# EAGLE board 2020-08-29-TinyISD1700_V2-AMD-sop-SPI-1206_SPI (EAGLE 7.5.0)
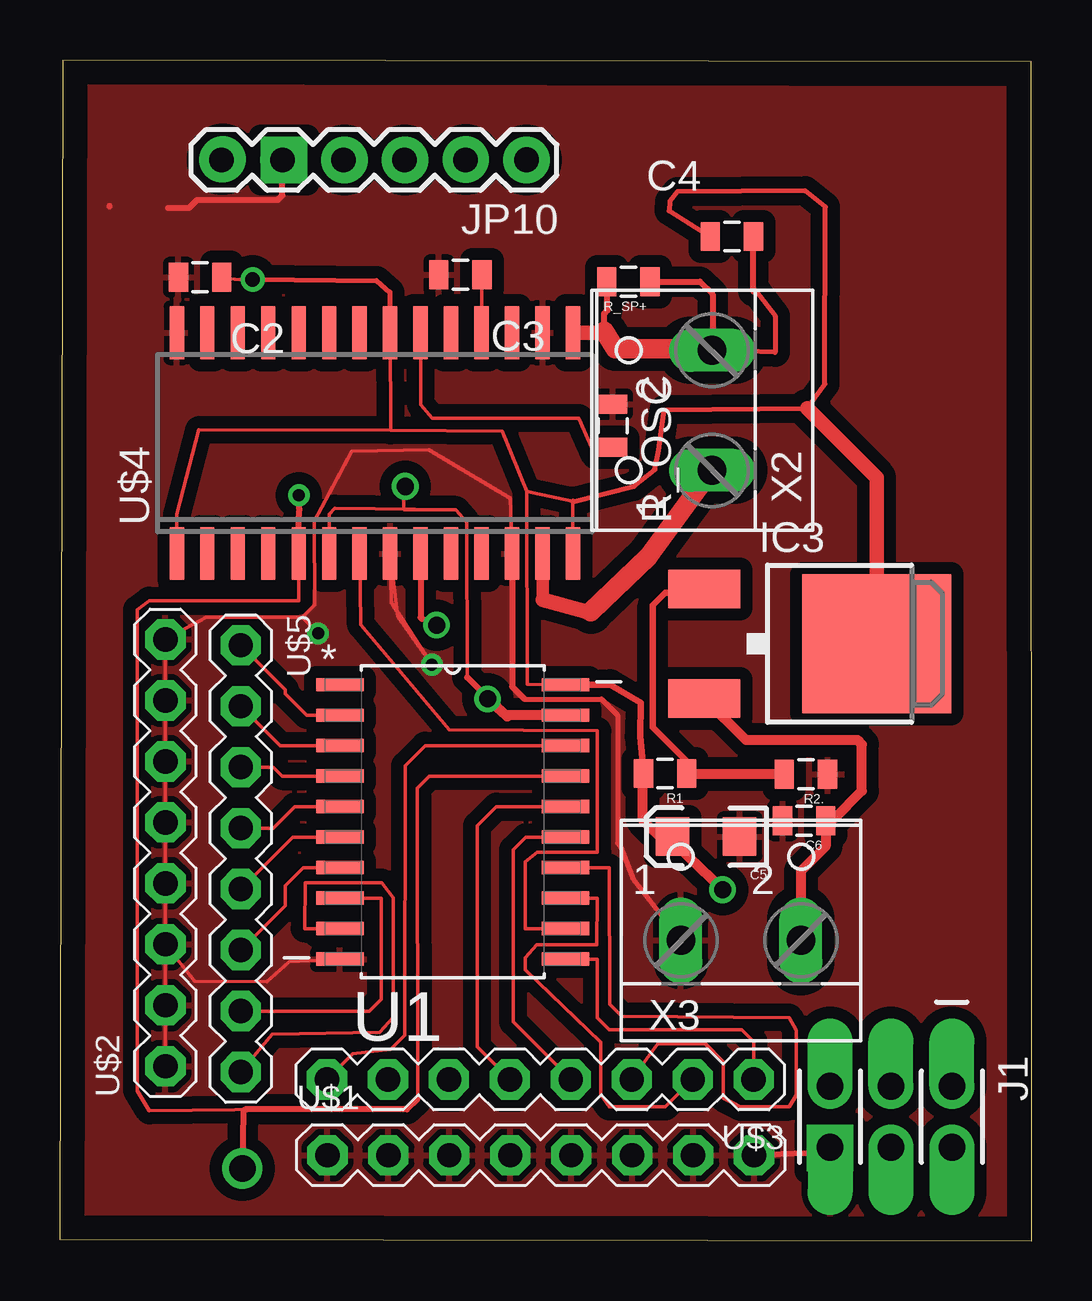
[diagram p0: board, top side]
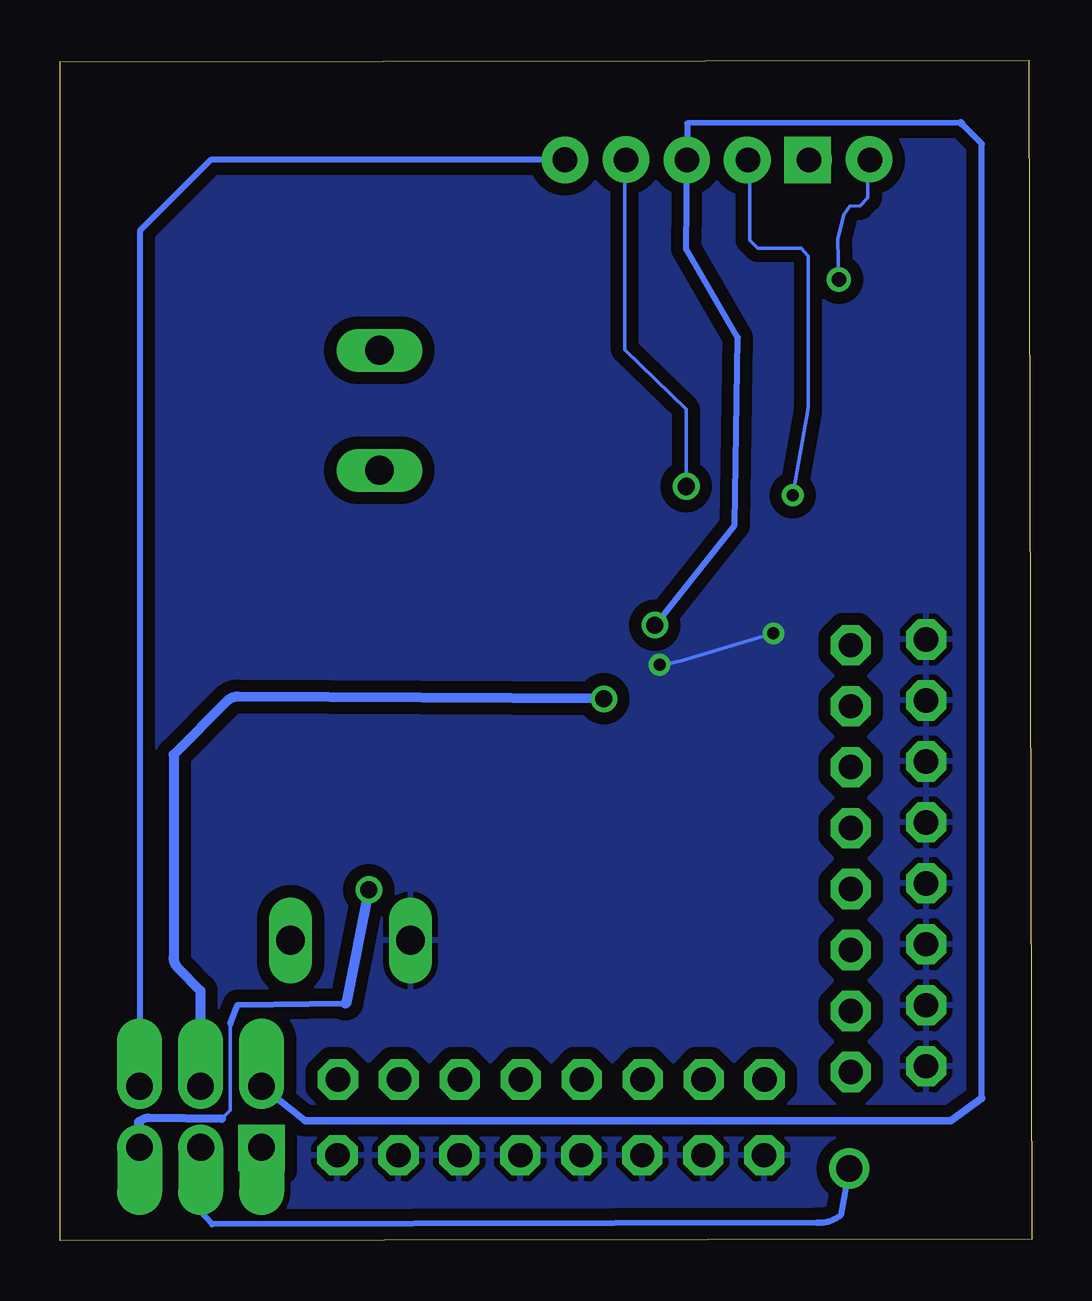
[diagram p1: board, bottom side, seen from below]

Size 40.48 x 49.19 mm. Coordinates in mm from the lower left corner, seen from the top.
Outline: 0,0.06 40.48,0 40.47,49.11 0.11,49.19 0,0.06
Copper layers (1*16): Top 0.035mm / dielectric 1.5mm / Bottom 0.035mm
Design rules "default *": minimum track width 10mil, minimum drill 24mil, track to track 20mil, track to pad 20mil, pad to pad 20mil, via to via 20mil, smd to smd 8mil, copper to edge 40mil, drill to drill 8mil, minimum pad ring 10mil, minimum via ring 8mil, stop-mask expansion 4mil, vias tented up to drill 0mil, thermal gap 10mil

## Footprints (pad centres in the part's own frame; a part is rotated, then mirrored left to right if it is on the bottom)
0805 = smd 0.8 x 1.2: 1 -0.9,0; 2 0.9,0
EIA3216 = smd 1.4 x 1.6: A 1.4,0; C -1.4,0
DPACK = smd 1.6 x 3: 1 -2.28,-4.8; 3 2.28,-4.8 | smd 5.8 x 6.2: 4 0,2.38
2X3_OFFSET = drill 1.118 pad 1.88 offset: 1 -2.54,-1.27; 2 -2.54,1.27; 3 0,-1.27; 4 0,1.27; 5 2.54,-1.27; 6 2.54,1.27
1X06 = drill 1.016 pad 1.88: 1 0,0; 2 2.54,0; 3 5.08,0; 4 7.62,0; 5 10.16,0; 6 12.7,0
SOIC127P1032X265-20N = smd 1.981 x 0.559: 1 -4.699,5.715; 2 -4.699,4.445; 3 -4.699,3.175; 4 -4.699,1.905; 5 -4.699,0.635; 6 -4.699,-0.635; 7 -4.699,-1.905; 8 -4.699,-3.175; 9 -4.699,-4.445; 10 -4.699,-5.715; 11 4.699,-5.715; 12 4.699,-4.445; 13 4.699,-3.175; 14 4.699,-1.905; 15 4.699,-0.635; 16 4.699,0.635; 17 4.699,1.905; 18 4.699,3.175; 19 4.699,4.445; 20 4.699,5.715
8PIN_HEADER = drill 1.016 pad 1.676 octagon: P$1 0,0; P$2 2.54,0; P$3 5.08,0; P$4 7.62,0; P$5 10.16,0; P$6 12.7,0; P$7 15.24,0; P$8 17.78,0
SO28W = smd 0.6 x 2.2: 1 -8.255,-4.6; 2 -6.985,-4.6; 3 -5.715,-4.6; 4 -4.445,-4.6; 5 -3.175,-4.6; 6 -1.905,-4.6; 7 -0.635,-4.6; 8 0.635,-4.6; 9 1.905,-4.6; 10 3.175,-4.6; 11 4.445,-4.6; 12 5.715,-4.6; 13 6.985,-4.6; 14 8.255,-4.6; 15 8.255,4.6; 16 6.985,4.6; 17 5.715,4.6; 18 4.445,4.6; 19 3.175,4.6; 20 1.905,4.6; 21 0.635,4.6; 22 -0.635,4.6; 23 -1.905,4.6; 24 -3.175,4.6; 25 -4.445,4.6; 26 -5.715,4.6; 27 -6.985,4.6; 28 -8.255,4.6
W237-102 = drill 1.194 long: 1 -2.5,-1.27; 2 2.5,-1.27

## Placement (x,y rotation side)
C2  [0805]  5.84,40.14 180 top
C3  [0805]  16.69,40.24 180 top
C4  [0805]  27.99,41.83 0 top
C5  [EIA3216]  26.92,16.83 180 top
C6  [0805]  31,17.49 180 top
IC3  LM317MDT  [DPACK]  31.65,24.86 270 top
J1  AVR_SPI_PRG_6OFFSET_PADS  [2X3_OFFSET]  34.62,5.16 180 top
JP10  [1X06]  19.43,45.03 180 top
R1  [0805]  25.21,19.45 180 top
R2.  [0805]  31.08,19.43 180 top
R_OSC  80kohm  [0805]  23.03,33.95 270 top
R_SP+  80kohm  [0805]  23.68,39.95 180 top
U1  ATTINY4313-SU  [SOIC127P1032X265-20N]  16.36,17.44 0 top
U$1  8PIN_HEADER  [8PIN_HEADER]  11.14,3.55 0 top
U$2  8PIN_HEADER  [8PIN_HEADER]  4.39,7.26 90 top
U$3  8PIN_HEADER  [8PIN_HEADER]  28.9,6.71 180 top
U$4  ISD1700SY  [SO28W]  13.12,33.22 0 top
U$5  8PIN_HEADER  [8PIN_HEADER]  7.53,24.8 270 top
X2  [W237-102]  25.9,34.59 90 top
X3  [W237-102]  28.37,13.78 0 top

## Library data of the parts
C2-C6 R_OSC R_SP+ = SparkFun2; OC_FARNELL: unknown
IC3 = v-reg; OC_FARNELL: unknown
J1 R1 R2. = SparkFun; OC_FARNELL: unknown
JP10 = SparkFun-Connectors; OC_FARNELL: unknown
U1 = Atmel_By_element14_Batch_1-00; MF: MICROCHIP; MPN: ATTINY4313-SU; OC_FARNELL: 1841621; OC_NEWARK: 12T1340; PACKAGE: SOIC-20; SUPPLIER: Atmel
U$1-U$3 U$5 = arduino; MF: RENESAS; MPN: YSDKS128E10; OC_FARNELL: 2946736
U$4 = isd-new-1; OC_FARNELL: unknown
X2 X3 = con-wago-500; OC_FARNELL: unknown; OC_NEWARK: 70K9898

## Nets
ANALN: J1.5 JP10.3 U$4.9
CSK: J1.3 JP10.2 U1.19 U$4.6
GND: C2.2 C3.2 C5.C C6.2 J1.6 JP10.5 R2..1 R_OSC.1 U1.10 U$1.P$1 U$1.P$2 U$1.P$3 U$1.P$4 U$1.P$5 U$1.P$6 U$1.P$7 U$1.P$8 U$2.P$1 U$2.P$2 U$2.P$3 U$2.P$4 U$2.P$5 U$2.P$6 U$2.P$7 U$2.P$8 U$4.8 U$4.12 U$4.16 U$4.28 X3.1
MISO: J1.1 JP10.1
MOSI: J1.4 JP10.4 U1.17 U$4.5
N$1: R_OSC.2 U$4.20
N$2: U1.13 U$3.P$2
N$3: U1.14 U$3.P$3
N$4: C4.2 R_SP+.1 X2.2
N$5: C3.1 U$4.18
N$6: U$4.13 X2.1
N$7: R_SP+.2 U$4.15
N$8: U1.15 U$3.P$4
N$9: U1.11 U$3.P$1
N$11: U1.9 U$5.P$8
N$12: U1.8 U$5.P$7
N$13: U1.7 U$5.P$6
N$14: U1.6 U$5.P$5
N$15: U1.3 U$5.P$2
N$16: U1.2 U$5.P$1
N$20: U1.16 U$3.P$5
N$28: C6.1 IC3.3 X3.2
N$29: IC3.1 R1.1 R2..2
PA0: U1.5 U$5.P$4
PA1: U1.4 U$5.P$3
Q: U1.18 U$3.P$8
SS: U1.12 U$4.7
VCC: C2.1 C4.1 C5.A IC3.4 J1.2 JP10.6 R1.2 U1.20 U$4.1 U$4.14 U$4.21

## Tracks (layer width: path | path; a pad name or v marks a point on that pad's centre or on a via)
ANALN  (via drill 0.5)
  Top 0.152: U$4.9 15.03,25.89 15.7,25.63
  Top 0.254: U$4.9 15.03,25.96 15.09,25.9 v15.66,25.65
  Bottom 0.254: 2.08,5.92 2.07,45.7 2.94,46.56 14.35,46.55 JP10.3 14.39,41.32 12.24,37.62 12.37,29.8 v15.66,25.65
  Bottom 0.305: J1.5 30.25,4.99 3.37,4.99 2.08,5.92 | 2.9,46.52 2.94,46.56
CSK  (via drill 0.7 pad 0.81)
  Top 0.152: U$4.6 11.22,30.26 11.44,30.51 16.49,30.45 | 16.49,30.45 16.94,29.92 16.97,23.47 | 16.49,30.45 14.34,30.45 14.31,30.48 14.31,31.33 v14.4,31.41
  Top 0.254: 16.97,23.47 18.59,21.84 21.05,21.9 U1.19
  Top 0.406: U1.19 18.69,21.89 arc90 18.64,21.84 arc-45 18.61,21.86 v17.82,22.57
  Bottom 0.15: 16.94,37.12 16.94,45.01
  Bottom 0.152: v14.4,31.41 14.4,34.63 16.94,37.12 | 16.94,45.01 JP10.2
  Bottom 0.406: v17.82,22.57 33.07,22.67 arc-45 33.52,22.48 35.75,20.25 35.75,11.79 arc-45 35.56,11.35 34.63,10.41 J1.3 arc-45 J1.3
GND  (via drill 0.5)
  Top 0.15: U$2.P$8 6.1,25.96 10.09,25.96 | 10.09,25.96 v10.75,25.3 | v15.5,24 13.8,26.59 U$4.8 14.06,25.99 v15.5,23.99 | U$4.12 18.76,30.93 15.37,32.96 12.16,32.89 10.59,29.97 10.61,26.48 10.09,25.96 | U1.10 9.55,11.62 8.62,10.78 5.62,10.79 U$2.P$3
  Top 0.152: U$2.P$1 U$2.P$2 U$2.P$3 U$2.P$4 U$2.P$5 U$2.P$6 U$2.P$7 U$2.P$8 | J1.6 32.09,3.24 32.08,4.44 32.06,3.85 32.67,3.9
  Top 0.2: 19.36,22.56 22.56,22.56 23.23,21.89 23.23,16.56 23.34,16.45 23.9,15.05 X3.1
  Top 0.254: 2.05,43.1 2.05,43.08 | 4.49,43.03 5.38,43.03 5.71,43.36 9.08,43.36 9.27,43.55 9.27,45.85 9.25,45.87 9.25,45.05 JP10.5 | 32.67,3.9 31.14,3.63 U$1.P$8 | U$4.12 18.84,23.08 19.36,22.56
  Bottom 0.15: v15.5,23.99 15.48,23.95 14.51,24.17 v10.75,25.3
  Bottom 0.254: JP10.5
  pour Top: 0.33,48.55 39.93,48.64 39.91,-0.63 0.25,-0.39 0.26,5.61
  pour Bottom: 40.43,48.9 40.43,47.93 40.11,47.93 40.11,0.1 0.51,0.1 0.51,0.8 0.35,0.8 0.12,48.85
MISO
  Bottom 0.254: JP10.1 34.2,45.03 37.16,42.07 J1.1
MOSI  (via drill 0.5 pad 0.41, 1.1 pad 1.68)
  Top 0.152: U1.17 15.38,19.35 14.88,18.85 14.9,5.92 14.42,5.53 3.72,5.42 3.22,6.24 3.22,26.28 3.72,26.67 9.95,26.67 U$4.5
  Top 0.254: 14.9,5.92 14.45,5.47 7.77,5.47 arc90 7.64,5.35 arc90 7.64,5.42 v7.6,3.01 | v9.95,31.05 9.99,30.7 arc45 9.96,30.51 9.94,30.06 U$4.5
  Bottom 0.15: 9.31,34.67 9.31,41.01 9.6,41.35 11.41,41.35 11.74,41.68 11.74,44.96 JP10.4
  Bottom 0.152: 9.31,34.67 arc-45 9.33,34.57 v9.95,31.05
  Bottom 0.254: v7.6,3.01 7.96,1.05 arc45 8.97,0.74 34.14,0.67 34.68,1.26 arc45 34.62,2.43 J1.4
N$1
  Top 0.152: 15.04,34.82 U$4.20
  Top 0.154: R_OSC.2 22.31,32.7 21.62,34.27 15.52,34.27 15.04,34.82
N$2
  Top 0.152: U$3.P$2 25.23,5.58 22.88,5.58 22.52,6.07 22.52,8.27 19.38,11.28 19.38,11.78 19.87,12.33 22.37,12.33 22.38,14.27 U1.13
N$3
  Top 0.152: U$3.P$3 24.91,8.19 26.87,8.19 | 26.87,8.19 26.9,8.19 27.63,7.45 27.64,5.93 28.34,5.58 | U1.14 22.88,15.54 22.9,9.84 23.4,9.34 30.38,9.28 30.67,8.76 30.67,6.05 30.38,5.58 28.35,5.57 27.66,5.94 27.63,5.97 27.63,7.43 26.87,8.19
N$4
  Top 0.205: 29.01,39.55 29.8,38.52 29.8,37.01 X2.2
  Top 0.254: 29.01,39.55 28.89,39.55 C4.2 | R_SP+.1 26.66,39.95 27.2,39.42 27.2,37.12 X2.2
N$5
  Top 0.15: U$4.18 17.57,40.22 C3.1
  Top 0.205: U$4.18
N$6
  Top 0.513: 20.12,26.69 U$4.13
  Top 0.6: 22.1,26.16 20.12,26.69
  Top 0.613: 22.12,26.19 22.1,26.16
  Top 0.813: X2.1 27.05,31.96 24.5,28.5 22.12,26.19
N$7
  Top 0.254: 22.67,37.88 22.67,38.62 22.8,38.76 22.8,39.93 R_SP+.2
  Top 0.6: U$4.15 22.83,37.82 22.67,37.88
  Top 0.813: 22.67,37.88 23.14,37.16 27.26,37.15
N$8
  Top 0.152: U$3.P$4 18.88,9.11 18.88,16.28 19.41,16.81 U1.15
N$9
  Top 0.152: U$3.P$1 28.9,8.28 28.4,8.78 22.88,8.78 22.38,9.28 22.38,11.73 U1.11
N$10  (via drill 1.1 pad 1.68)
  other vias: 34.63,6.42
N$11
  Top 0.152: U$5.P$8 8.85,8.59 13.31,8.69 13.88,9.31 13.88,14.28 13.41,14.91 10.22,14.91 10.2,13 U1.9
N$12
  Top 0.152: U$5.P$7 12.88,9.56 13.38,10.06 13.38,14.27 U1.8
N$13
  Top 0.152: U$5.P$6 9.38,13.95 9.38,14.78 10.14,15.54 U1.7
N$14
  Top 0.152: U$5.P$5 9.7,16.81 U1.6
N$15
  Top 0.152: U$5.P$2 9.18,20.62 U1.3
N$16
  Top 0.152: U$5.P$1 9.38,22.95 9.38,22.78 10.28,21.89 U1.2
N$17  (via drill 0.7 pad 0.81)
  other vias: 15.7,25.64
N$18  (via drill 1.1 pad 1.68)
  other vias: 34.61,3.88
N$19  (via drill 0 pad 1.42)
  other vias: 32.1,6.4
N$20
  Top 0.152: U$3.P$5 17.38,8.07 17.38,17.28 18.18,18.08 U1.16
N$21  (via drill 0.7 pad 0.81)
  other vias: 17.82,22.57
N$22  (via drill 0.7 pad 0.3)
  other vias: 27.61,14.61
N$23  (via drill 1.1 pad 1.68)
  other vias: 7.6,3.01
N$24  (via drill 1.1 pad 0.81)
  other vias: 37.16,6.41
N$26  (via drill 0.7 pad 0.81)
  other vias: 14.38,31.43
N$27  (via drill 1.1 pad 0.81)
  other vias: 37.18,3.88
N$28
  Top 0.406: X3.2 30.88,13.17 30.88,15.41 31.9,16.43 C6.1 31.82,17.57 32.25,17.57 33.41,18.73 33.41,20.66 33.23,20.85 28.58,20.85 IC3.3
N$29
  Top 0.28: R1.1 26.11,19.97 24.71,21.38 24.71,26.46 25.22,26.98 26.69,26.98 IC3.1
  Top 0.406: R2..2 26.14,19.43 R1.1
N$30  (via drill 1 pad 0.81)
  other vias: 19.45,45.05
N$31  (via drill 1 pad 0.81)
  other vias: 16.9,45.02
N$32  (via drill 1 pad 0.81)
  other vias: 14.34,45.03
N$33  (via drill 1 pad 0.81)
  other vias: 11.8,45.03
N$34  (via drill 1 pad 0.81)
  other vias: 9.27,45.04
N$35  (via drill 1 pad 0.81)
  other vias: 6.73,45.02
N$36  (via drill 0 pad 1.42)
  other vias: 34.67,6.44
N$37  (via drill 1 pad 0.81)
  other vias: 32.09,3.87
N$38  (via drill 1.1 pad 0.81)
  other vias: 32.08,6.43
N$39  (via drill 0 pad 1.42)
  other vias: 37.2,6.4
N$40  (via drill 0 pad 1.42)
  other vias: 37.22,3.91
N$41  (via drill 0 pad 1.42)
  other vias: 34.67,3.83
N$42  (via drill 0 pad 1.93)
  other vias: 32.08,3.85
N$43  (via drill 0 pad 1.93)
  other vias: 9.33,45.02
N$44  (via drill 0 pad 1.93)
  other vias: 11.85,45.02
N$45  (via drill 0 pad 1.93)
  other vias: 14.37,45.02
N$46  (via drill 0 pad 1.93)
  other vias: 16.9,45.04
N$47  (via drill 0 pad 1.93)
  other vias: 19.44,45.02
N$48  (via drill 0 pad 1.93)
  other vias: 6.78,45.05
PA0
  Top 0.152: U$5.P$4 8.88,17.18 9.78,18.08 U1.5
PA1
  Top 0.152: U$5.P$3 8.88,19.72 9.26,19.35 U1.4
Q
  Top 0.152: U$3.P$8 12.19,7.78 13.78,7.97 14.36,8.56 14.38,19.78 15.22,20.62 U1.18
SS
  Top 0.152: U1.12 19.38,13 19.38,15.78 19.89,16.18 22.39,16.18 22.39,21.23 16.23,21.29 12.54,25.65 U$4.7
VCC  (via drill 0.6, 0.7 pad 0.3)
  Top 0.15: 6.79,39.93 C2.1 6.69,40.11 6.72,40.12 7.28,40.05 v8.03,40.04 8.06,40.06 8.05,40.04
  Top 0.152: 21.37,30.78 U$4.14 | U1.20 19.47,23.17 19.44,31.21 | U$4.21 13.78,33.76 5.78,33.78 4.87,30.27 U$4.1
  Top 0.154: 21.36,30.79 19.69,31.15 19.44,31.21 18.43,33.72 13.78,33.76
  Top 0.205: C4.1 25.38,42.9 25.41,43.31 25.72,43.7 31.05,43.73 31.89,43.07 31.87,35.68 31.13,34.67 25.18,34.61 24.94,32.92 24.78,32.13 23.91,31.42 21.37,30.78 21.38,30.81 21.36,30.79 | 8.05,40.04 13.19,39.99 13.75,39.51 U$4.21
  Top 0.28: U1.20 22.92,23.16 24.2,22.41 24.18,21.01 R1.2
  Top 0.406: R1.2 24.29,19.43 24.29,17.52 25.26,16.55 C5.A arc-45 25.7,16.45 v27.61,14.62
  Top 0.6: IC3.4 34.03,31.78 31.13,34.67
  Bottom 0.15: 33.75,5.07 33.38,5.44 33.38,9.02 | 6.64,45.1 6.67,45.1 6.82,44.95 6.82,43.44 7.14,43.11 7.57,43.1 7.83,42.74 8.07,41.72 v8.03,40.04
  Bottom 0.254: JP10.6 6.64,45.1 | 33.38,9.02 33.08,9.82 28.6,9.88
  Bottom 0.35: 33.75,5.07 36.8,5.11 arc-45 37.19,4.95
  Bottom 0.406: v27.61,14.62 28.55,9.91 arc45 28.6,9.88 | 37.11,3.87 arc45 J1.2 arc45 37.19,3.95 37.19,4.95